# Allegro board MASINUTA_WI-FI.brd
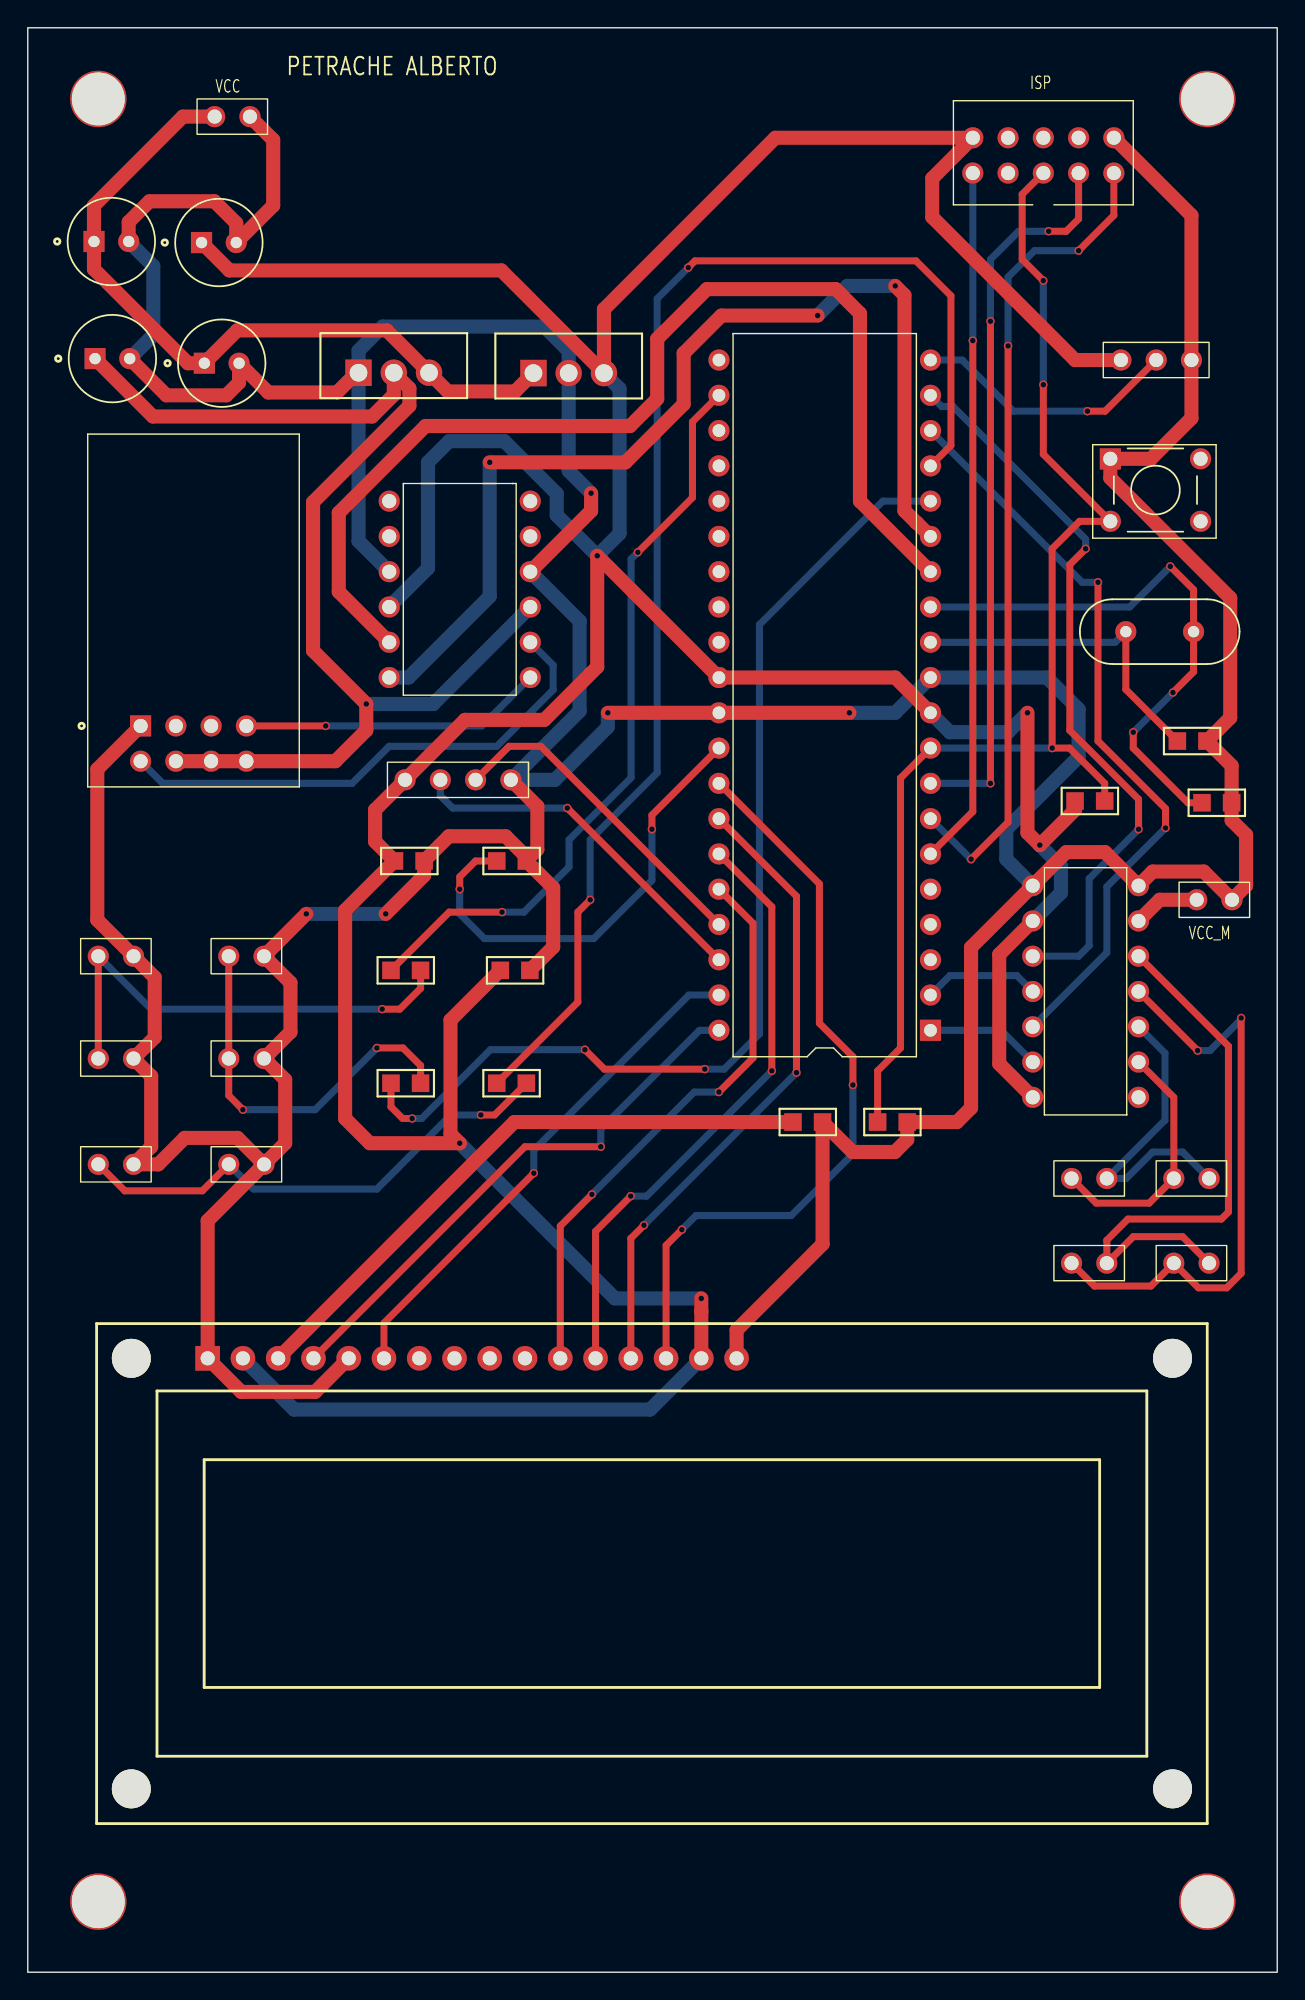
[diagram p0: board, top side]
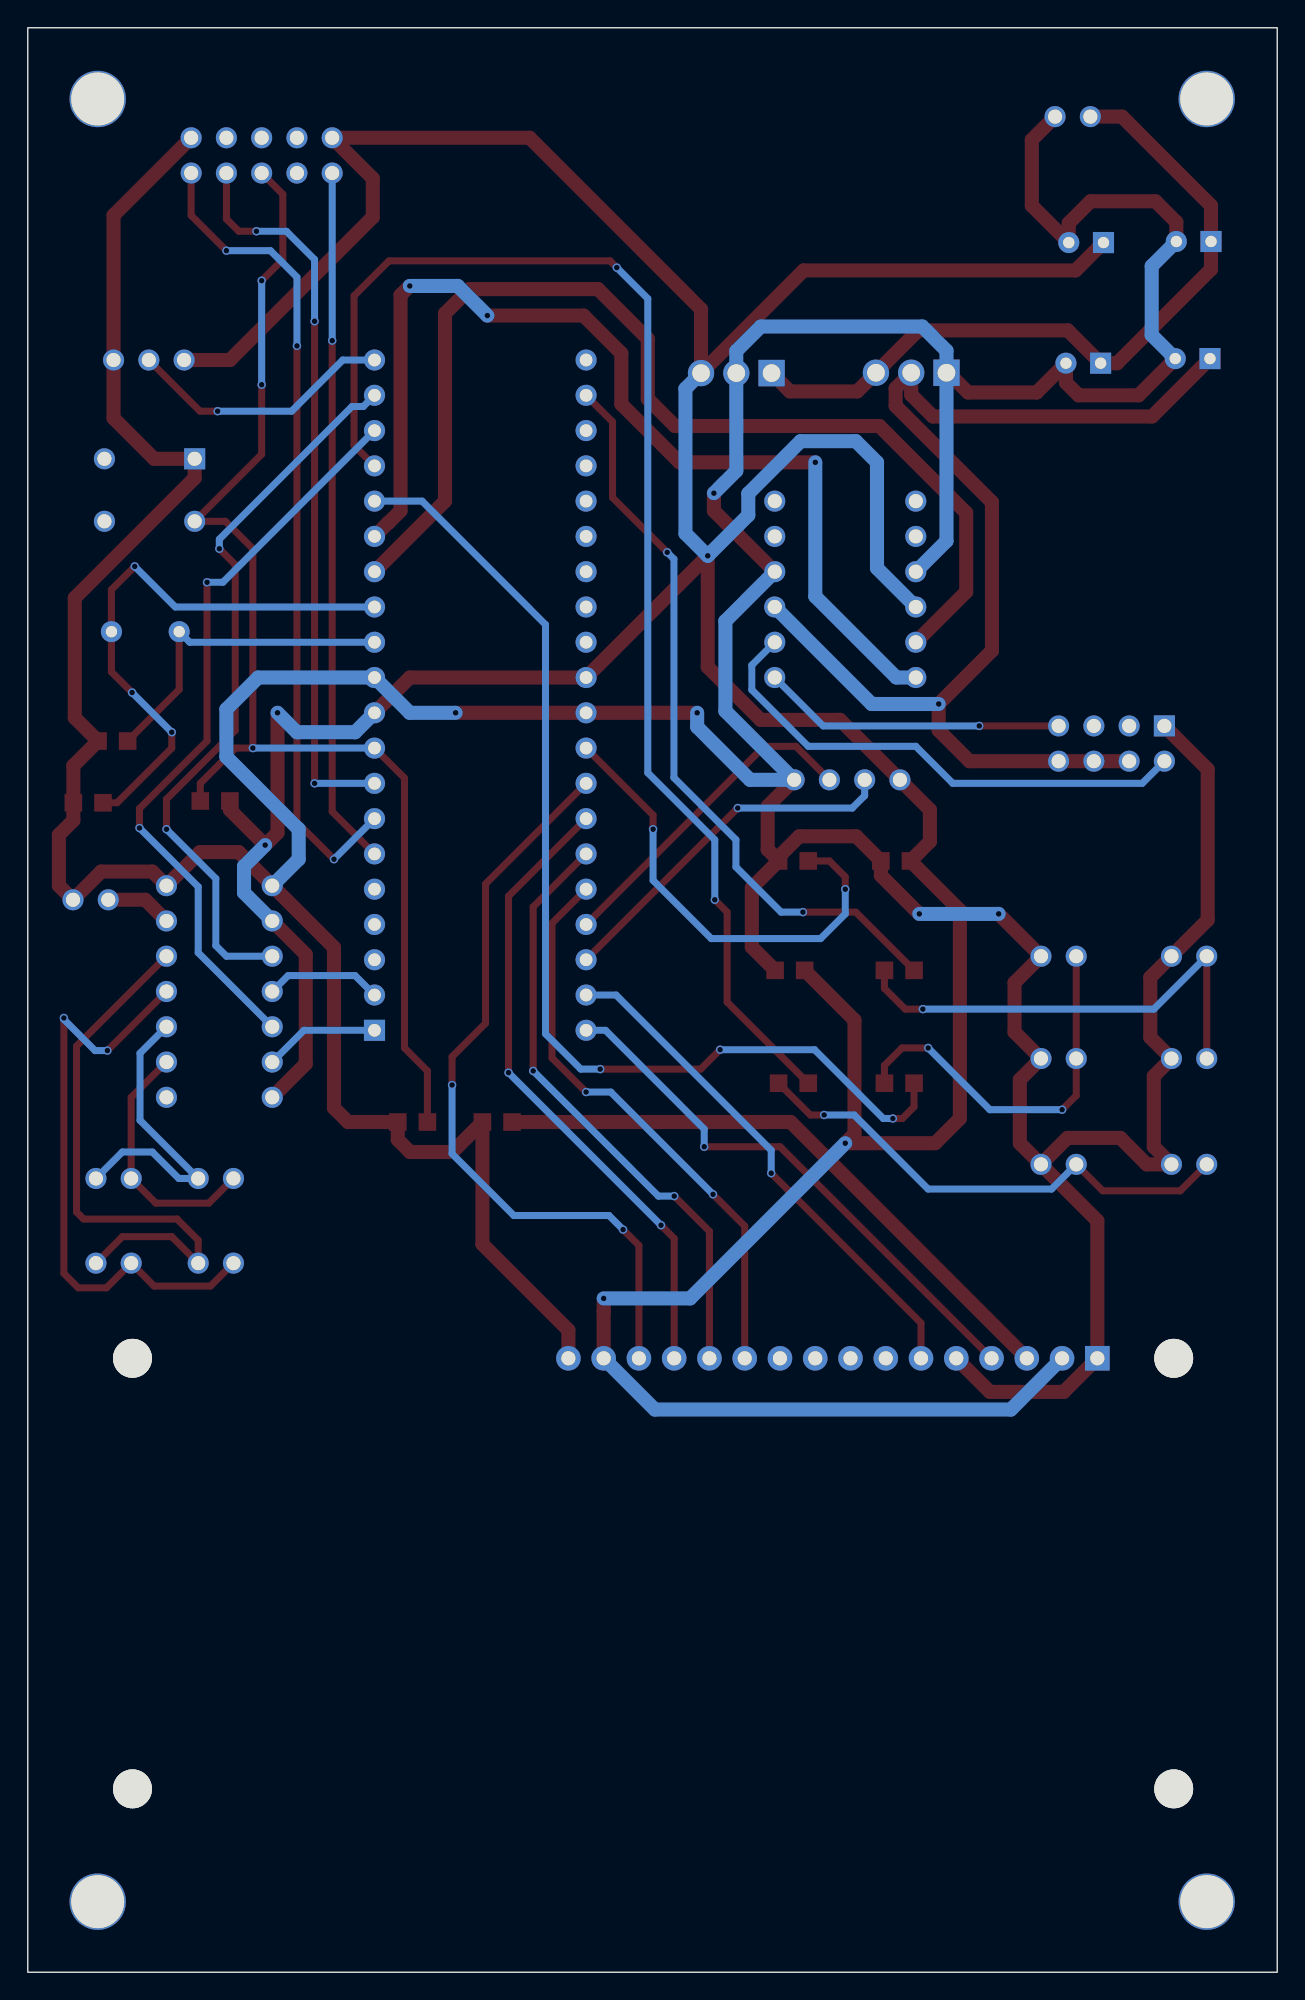
[diagram p1: board, bottom side, seen from below]

Outline 90 x 140 mm; copper layers: TOP, BOTTOM. Coordinates in mm from the lower left corner of the outline.
Outline path: rectangle 0,0 90,140

## Design rules (mm)
nets with their own width: min track width 0.508; nets MISO MOSI N07115 N07119 N08352 N08359 N08366 N08373 N08380 N08387 N08914 N08921 N10417 N10424 N10479 N10486 N11422 N11436 N12939 N12951 N12963 N15154 N15162 N15170 N27612 N34601 N34608 N36403 N36415 N43036 N54745 SCK
nets with their own width: min track width 1.016; nets +3.3V +5V GND N06033 N06910 N06922 N033242 N62158

## Placement (name value [footprint] x y rotation side)
BUZZ1  BUZZER  [JUMPER3]  78.74 116.08 0 top
C1  10u  [CAPTHT]  6.02 124.61 0 top
C2  10u  [CAPTHT]  6.1 116.18 0 top
C3  0.33u  [CAPTHT]  13.97 115.85 0 top
C4  0.1u  [CAPTHT]  13.77 124.54 0 top
C5  100n  [SMC0805]  33.78 80.01 0 top
C6  100n  [SMC0805]  61.21 61.21 0 top
C7  100n  [SMC0805]  34.04 72.14 0 top
C8  100n  [SMC0805]  26.42 80.01 0 top
C9  22p  [SMC0805]  82.8 88.65 0 top
C10  22p  [SMC0805]  84.58 84.2 0 top
D1  LED  [JUMPER2]  5.08 73.15 0 top
D2  LED  [JUMPER2]  5.08 65.79 0 top
D3  LED  [JUMPER2]  14.48 73.15 0 top
D4  LED  [JUMPER2]  14.48 65.79 0 top
D5  LED  [JUMPER2]  5.08 58.17 0 top
D6  LED  [JUMPER2]  14.48 58.17 0 top
J1  ISP  [CONN10]  68.07 129.54 0 top
J2  DC MOTOR  [JUMPER2]  75.18 57.15 0 top
J3  DC MOTOR  [JUMPER2]  82.55 57.15 0 top
J4  VCC  [JUMPER2]  13.46 133.6 0 top
J5  DC MOTOR  [JUMPER2]  75.18 51.05 0 top
J6  DC MOTOR  [JUMPER2]  82.55 51.05 0 top
J7  VCC MOTOARE  [JUMPER2]  84.2 77.22 0 top
NOREF  -  [unnamed]  5.08 5.08 0 top
NOREF#2  -  [unnamed]  84.96 134.87 0 top
NOREF#3  -  [#2]  0 140 0 top
NOREF#4  -  [unnamed]  5.08 134.87 0 top
NOREF#5  -  [#2]  90 0 90 top
NOREF#6  -  [unnamed]  84.96 5.08 0 top
R1  1.8k  [SMR0805]  55.12 61.21 0 top
R2  10k  [SMR0805]  75.44 84.33 0 top
R3  100  [SMR0805]  26.16 72.14 0 top
R4  100  [SMR0805]  26.16 64.01 0 top
R5  100  [SMR0805]  33.78 64.01 0 top
SW1  SW PUSHBUTTON  [PUSHSW]  77.98 108.97 0 top
U1  LM1117T-33  [TO254]  28.91 116.18 0 top
U2  -  [LCD-16X2]  44.96 28.7 0 top
U3  HC-SR04  [JUMPER4]  27.18 85.85 0 top
U4  -  [DRV8835]  72.39 78.23 0 top
U5  LM7805C  [TO254]  41.5 116.15 0 top
U6  ATMEGA1284-PU  [DIP40_6]  65.02 67.82 180 top
U7  CONVERTOR NIVEL LOGIC  [LOGICLEVELCONV]  26.04 105.92 0 top
U8  ESP-01  [ESP01]  11.94 98.04 0 top
Y1  14.7456MHz  [HC49]  81.53 96.52 0 top

## Library data of the parts
BUZZ1 = BUZZER_3: User Part Number: ***
C1 = CAP POL_0
C2 = CAP POL_3
C3 C4 = CAP POL_4
C5-C10 = C
D1-D6 = LED_0: User Part Number: ***
J1 = HEADER 5X2_1: User Part Number: ***
J2-J7 = HEADER 2: User Part Number: ***
R1-R5 = R
SW1 = SW PUSHBUTTON-SPST-NC_4
U1 = LM1117T-33_10
U2 = LCD-16X2_6
U3 = HC-SR04: User Part Number: ***
U4 = DRV8835_3
U5 = LM7805C_8
U6 = ATMEGA1284-PU_3: Tolerance: ***; User Part Number: ***
U7 = BOB-12009_5
U8 = ESP8266-01ESP-01_3
Y1 = CRYSTAL

## Footprints (pads in the part's own frame, mm; a bottom-side part is the same pattern mirrored in y, then rotated)
CAPTHT
  round 1.524 hole 0.813: N(1.25,0)
  rect 1.524x1.524 hole 0.813: P(-1.25,0)
CONN10
  round 1.524 hole 1.016: 1(0,0) 2(0,2.54) 3(2.54,0) 4(2.54,2.54) 5(5.08,0) 6(5.08,2.54) 7(7.62,0) 8(7.62,2.54) 9(10.16,0) 10(10.16,2.54)
DIP40_6
  rect 1.524x1.524 hole 0.914: 1(0,0)
  round 1.524 hole 0.914: 2(0,-2.54) 3(0,-5.08) 4(0,-7.62) 5(0,-10.16) 6(0,-12.7) 7(0,-15.24) 8(0,-17.78) 9(0,-20.32) 10(0,-22.86) 11(0,-25.4) 12(0,-27.94) 13(0,-30.48) 14(0,-33.02) 15(0,-35.56) 16(0,-38.1) 17(0,-40.64) 18(0,-43.18) 19(0,-45.72) 20(0,-48.26) 21(15.24,-48.26) 22(15.24,-45.72) 23(15.24,-43.18) 24(15.24,-40.64) 25(15.24,-38.1) 26(15.24,-35.56) 27(15.24,-33.02) 28(15.24,-30.48) 29(15.24,-27.94) 30(15.24,-25.4) 31(15.24,-22.86) 32(15.24,-20.32) 33(15.24,-17.78) 34(15.24,-15.24) 35(15.24,-12.7) 36(15.24,-10.16) 37(15.24,-7.62) 38(15.24,-5.08) 39(15.24,-2.54) 40(15.24,0)
DRV8835
  round 1.524 hole 1.016: 1(0,0) 2(0,-2.54) 3(0,-5.08) 4(0,-7.62) 5(0,-10.16) 6(0,-12.7) 7(0,-15.24) 8(7.62,-15.24) 9(7.62,-12.7) 10(7.62,-10.16) 11(7.62,-7.62) 12(7.62,-5.08) 13(7.62,-2.54) 14(7.62,0)
ESP01
  rect 1.524x1.524 hole 1.016: 1(-3.81,-8.31)
  round 1.524 hole 1.016: 2(-1.27,-8.31) 3(1.27,-8.31) 4(3.81,-8.31) 5(-3.81,-10.85) 6(-1.27,-10.85) 7(1.27,-10.85) 8(3.81,-10.85)
HC49
  round 1.524 hole 0.813: 1(-2.44,0) 2(2.44,0)
JUMPER2
  round 1.524 hole 1.016: 1(0,0) 2(2.54,0)
JUMPER3
  round 1.524 hole 1.016: 1(0,0) 2(2.54,0) 3(5.08,0)
JUMPER4
  round 1.524 hole 1.016: 1(0,0) 2(2.54,0) 3(5.08,0) 4(7.62,0)
LCD-16X2
  round 2.8 hole 2.8 unplated: (-37.5,15.5) (-37.5,-15.5) (37.5,15.5) (37.5,-15.5)
  rect 1.778x1.778 hole 1.016: 1(-32,15.5)
  round 1.778 hole 1.016: 2(-29.46,15.5) 3(-26.92,15.5) 4(-24.38,15.5) 5(-21.84,15.5) 6(-19.3,15.5) 7(-16.76,15.5) 8(-14.22,15.5) 9(-11.68,15.5) 10(-9.14,15.5) 11(-6.6,15.5) 12(-4.06,15.5) 13(-1.52,15.5) 14(1.02,15.5) 15(3.56,15.5) 16(6.1,15.5)
LOGICLEVELCONV
  round 1.524 hole 1.016: 1(0,0) 2(0,-2.54) 3(0,-5.08) 4(0,-7.62) 5(0,-10.16) 6(0,-12.7) 7(10.16,-12.7) 8(10.16,-10.16) 9(10.16,-7.62) 10(10.16,-5.08) 11(10.16,-2.54) 12(10.16,0)
PUSHSW
  rect 1.524x1.524 hole 1.016: 1(0,0)
  round 1.524 hole 1.016: 2(0,-4.5) 3(6.5,0) 4(6.5,-4.5)
SMC0805
  rect 1.27x1.27 smd: 1(0,0) 2(2.134,0)
SMR0805
  rect 1.27x1.27 smd: 1(0,0) 2(2.134,0)
TO254
  rect 1.905x1.905 hole 1.27: 1(-5.08,-1.016)
  round 1.905 hole 1.27: 2(-2.54,-1.016) 3(0,-1.016)
unnamed
  round 4.064 hole 3.81: (0,0)

## Nets
+3.3V: C2.P(1) U1.2(OUT) U7.9(LV) U8.6(CH_PD) U8.7(R\S\T\) U8.8(VCC)
+5V: BUZZ1.1(+) C4.P(1) C7.1 C8.1 J1.2(VCC) R2.1 U2.2(VDD) U2.15(A) U3.1(VCC) U4.2(VCC) U4.7(MODE) U5.3(OUT) U6.10(VCC) U6.30(AVCC) U7.4(HV)
GND: BUZZ1.3(-) C1.N(2) C2.N(2) C3.N(2) C4.N(2) C5.2 C6.2 C7.2 C8.2 C9.2 C10.2 D1.2(CATHODE) D2.2(CATHODE) D3.2(CATHODE) D4.2(CATHODE) D5.2(CATHODE) D6.2(CATHODE) J1.10(GND) J4.2 J7.2 R1.2 SW1.1 U1.1(ADJ/GND) U2.1(VSS) U2.5(R/W) U2.16(K) U3.4(GND) U4.1(GND#1) U4.14(GND#14) U5.2(GND) U6.11(GND_2) U6.31(GND) U7.3(GND#3) U7.10(GND#10) U8.1(GND)
MISO: J1.9(MISO) U6.7(PB6)
MOSI: J1.1(MOSI) U6.6(PB5)
SCK: J1.7(SCK) U6.8(PB7)
N06033: C1.P(1) C3.P(1) J4.1 U1.3(IN) U5.1(IN)
N06910: U6.14(PD0) U7.5(HV2)
N06922: U6.15(PD1) U7.6(HV1)
N07115: U7.8(LV2) U8.5(TXD)
N07119: U7.7(LV1) U8.4(RXD)
N08352: U2.4(RS) U6.40(PA0)
N08359: U2.6(E) U6.39(PA1)
N08366: U2.11(D4) U6.36(PA4)
N08373: U2.12(D5) U6.35(PA5)
N08380: U2.13(D6) U6.34(PA6)
N08387: U2.14(D7) U6.33(PA7)
N08914: C9.1 U6.12(XTAL2) Y1.1
N08921: C10.1 U6.13(XTAL1) Y1.2
N10417: J2.2 J3.2 U4.10(AOUT2)
N10424: J2.1 J3.1 U4.9(AOUT1)
N10479: J5.1 J6.1 U4.11(BOUT1)
N10486: J5.2 J6.2 U4.12(BOUT2)
N11422: U4.5(AENBL) U6.18(PD4)
N11436: U4.3(BENBL) U6.19(PD5)
N12939: D1.1(ANODE) D2.1(ANODE) R3.2
N12951: D3.1(ANODE) D4.1(ANODE) R4.2
N12963: D5.1(ANODE) D6.1(ANODE) R5.2
N15154: R3.1 U6.22(PC0)
N15162: R4.1 U6.16(PD2)
N15170: R5.1 U6.17(PD3)
N27612: C6.1 J1.5(RST) R2.2 SW1.2 U6.9(RESET)
N033242: R1.1 U2.3(VO)
N34601: U3.3(ECHO) U6.37(PA3)
N34608: U3.2(TRIG) U6.38(PA2)
N36403: U4.6(APHASE) U6.1(PB0)
N36415: U4.4(BPHASE) U6.2(PB1)
N43036: BUZZ1.2(S) U6.20(PD6)
N54745: C5.1 U6.32(AREF)
N62158: J7.1 U4.13(VIN)

Pads without a net: J1 3 4 6 8; SW1 3 4; U2 7 8 9 10; U4 8; U6 3 4 5 21 23 24 25 26 27 28 29; U7 1 2 11 12; U8 2 3

## Via types
v1: diameter 0.61, hole 0.4, TOP to BOTTOM, 59 vias

## Routing (per net, layer and track width the routed paths; a pad name or vN(x,y) marks a point on that pad's centre or on a via; arc(x,y) is an arc through that point)
+3.3V: length 85.5
  TOP w1.016: C2.P 9.01,112.01 24.8,112.01 26.37,113.58 U1.2 27.49,114.04 27.49,112.78 20.55,105.84 20.55,95.15 v1(24.38,91.31) 24.38,89.42 22.16,87.19 U8.8 U8.7 U8.6
  BOTTOM w1.016: v1(24.38,91.31) 29.21,91.31 U7.9
+5V: length 347.7
  TOP w1.016: C4.P 14.52,122.53 34.11,122.53 U5.3 41.5,119.74 53.85,132.08 J1.2 65.15,129.16 65.15,126.36 75.44,116.08 BUZZ1.1 ; v1(48.51,48.51) 48.51,47.57 48.52,47.57 U2.15 ; C7.1 30.45,68.55 30.45,60.35 v1(31.11,59.69) 24.64,59.69 22.86,61.47 22.86,76.45 C8.1 25.02,81.41 25.02,83.69 U3.1 31.5,90.17 37.21,90.17 41.02,93.98 v1(41.02,101.98) U6.30 62.48,93.22 U6.10 ; U4.7 69.98,65.41 69.98,73.28 U4.2 ; R2.1 75.44,83.69 v1(72.9,81.15) 72.01,82.04 v1(72.01,90.68)
  BOTTOM w1.016: U5.3 42.63,114.02 42.63,103.59 v1(41.02,101.98) 38.1,104.9 38.1,106.46 34.33,110.24 30.35,110.24 28.83,108.71 28.83,101.09 U7.4 ; v1(72.01,90.68) 70.61,89.28 66.42,89.28 U6.10 ; v1(48.51,48.51) 42.29,48.51 v1(31.11,59.69) ; U2.2 19.19,40.51 44.83,40.51 U2.15 ; v1(72.9,81.15) 74.42,79.63 74.42,77.72 U4.2
GND: length 453.8
  TOP w1.016: 35.92,80.04 35.92,80.3 34.42,81.79 30.33,81.79 C8.2 28.55,78.97 v1(25.78,76.2) ; 35.92,80.04 C5.2 37.85,78.08 37.85,73.81 C7.2 ; 35.92,80.04 36.7,80.83 36.7,83.95 U3.4 ; D6.2 18.54,59.69 18.54,64.26 D4.2 18.92,67.69 18.92,71.25 D3.2 v1(20.07,76.2) ; D6.2 12.96,54.11 U2.1 15.38,41.78 20.7,41.78 U2.5 ; D6.2 15.11,60.07 11.3,60.07 9.4,58.17 D5.2 8.89,59.44 8.89,64.52 D2.2 9.14,67.31 9.14,71.63 D1.2 5.01,75.76 5.01,86.61 U8.1 ; U2.16 51.06,46.23 57.25,52.43 R1.2 59.41,59.05 62.46,59.05 63.35,59.94 C6.2 66.93,61.21 67.94,62.23 67.94,73.79 U4.1 74.8,80.64 77.6,80.64 U4.14 81.03,79.25 84.71,79.25 J7.2 87.76,78.23 87.76,81.89 86.72,82.93 C10.2 86.72,86.87 C9.2 86.61,90.32 86.61,98.95 77.98,107.58 SW1.1 80.9,108.97 83.82,111.89 BUZZ1.3 83.82,126.49 J1.10 ; v1(41.78,90.68) U6.31 v1(59.18,90.68) ; C1.N 7.27,126.01 8.77,127.51 13.44,127.51 15.02,125.93 C4.N 17.68,127.2 17.68,131.93 J4.2 ; U1.1 23.7,115.16 22.28,113.74 17.33,113.74 C3.N 15.22,114.45 14.31,113.54 9.99,113.54 C2.N ; U7.10 40.58,105.22 v1(40.58,106.49)
  BOTTOM w1.016: C1.N 9.04,122.84 9.04,117.88 C2.N ; U7.3 23.83,103.05 U1.1 23.83,116.75 25.57,118.49 37.2,118.49 38.96,116.73 U5.2 38.96,108.1 v1(40.58,106.49) ; v1(59.18,90.68) 62.48,90.68 U6.11 73.41,93.22 75.69,90.93 75.69,87.5 70.48,82.3 70.48,80.14 U4.1 ; U7.10 39.75,97.28 39.75,90.81 U3.4 37.97,85.85 41.78,89.66 v1(41.78,90.68) ; v1(20.07,76.2) v1(25.78,76.2)
MISO: length 59.7
  TOP w0.508: v1(75.69,123.95) 78.23,126.49 J1.9 ; v1(67.94,80.14) 70.61,82.8 v1(70.61,117.09)
  BOTTOM w0.508: v1(70.61,117.09) 70.61,122.05 72.52,123.95 v1(75.69,123.95) ; v1(67.94,80.14) U6.7
MOSI: length 50.3
  TOP w0.508: U6.6 68.07,83.57 v1(68.07,117.47)
  BOTTOM w0.508: J1.1 v1(68.07,117.47)
SCK: length 52.9
  TOP w0.508: J1.7 75.69,126.24 74.8,125.35 v1(73.53,125.35) ; v1(69.34,118.87) v1(69.34,85.6)
  BOTTOM w0.508: v1(69.34,85.6) U6.8 ; v1(69.34,118.87) 69.34,123.32 71.37,125.35 v1(73.53,125.35)
N06033: length 53.7
  TOP w1.016: J4.1 11.18,133.6 4.77,127.2 C1.P 4.77,122.61 11.53,115.85 C3.P 15.08,118.21 25.86,118.21 U1.3 30.25,113.82 35.1,113.82 U5.1
N06910: length 79
  TOP w1.016: U6.14 59.94,105.92 59.94,119.43 58.19,121.18 48.92,121.18 45.34,117.6 45.34,113.28 43.38,111.33 28.65,111.33 22.4,105.08 22.4,99.39 U7.5
N06922: length 75
  TOP w1.016: v1(33.27,108.71) 43.05,108.71 47.24,112.9 47.24,116.56 49.96,119.28 v1(56.9,119.28) ; U6.15 64.04,104.37 64.01,104.37 63.15,105.23 63.15,120.75 v1(62.48,121.41)
  BOTTOM w1.016: v1(62.48,121.41) 59.03,121.41 v1(56.9,119.28) ; U7.6 27.43,93.22 33.27,99.06 v1(33.27,108.71)
N07115: length 37.3
  BOTTOM w0.508: U7.8 37.85,94.11 37.85,92.33 33.78,88.27 26.04,88.27 23.37,85.6 9.72,85.6 U8.5
N07119: length 21.9
  TOP w0.508: U8.4 v1(21.46,89.73)
  BOTTOM w0.508: U7.7 32.71,89.73 v1(21.46,89.73)
N08352: length 39.7
  TOP w0.508: U2.4 35.81,59.44 v1(41.27,59.44)
  BOTTOM w0.508: U6.40 48.39,67.82 41.27,60.71 v1(41.27,59.44)
N08359: length 37.4
  TOP w0.508: v1(36.45,57.53) 25.66,46.74 U2.6
  BOTTOM w0.508: v1(36.45,57.53) 36.45,59.18 47.62,70.36 U6.39
N08366: length 41.6
  TOP w0.508: v1(40.64,56.01) 38.36,53.73 U2.11 ; U6.36 52.24,75.52 52.24,65.83 v1(49.78,63.37)
  BOTTOM w0.508: v1(40.64,56.01) 48.01,63.37 v1(49.78,63.37)
N08373: length 43.8
  TOP w0.508: v1(43.43,55.88) 40.9,53.34 U2.12 ; U6.35 53.59,76.71 v1(53.59,64.9)
  BOTTOM w0.508: v1(43.43,55.88) 44.58,55.88 v1(53.59,64.9)
N08380: length 46.1
  TOP w0.508: U6.34 55.37,77.47 v1(55.37,64.77) ; U2.13 43.44,52.84 v1(44.39,53.78)
  BOTTOM w0.508: v1(55.37,64.77) v1(44.39,53.78)
N08387: length 55
  TOP w0.508: v1(59.44,63.88) 59.44,65.91 57.02,68.33 57.02,78.36 U6.33 ; U2.14 45.98,52.33 v1(47.12,53.47)
  BOTTOM w0.508: v1(59.44,63.88) 59.44,58.93 54.99,54.48 48.13,54.48 v1(47.12,53.47)
N08914: length 23.8
  TOP w0.508: Y1.1 79.09,92.36 C9.1
  BOTTOM w0.508: U6.12 78.33,95.76 Y1.1
N08921: length 40.6
  TOP w0.508: C10.1 83.57,84.2 79.63,88.14 v1(79.63,89.28) ; v1(82.49,92.14) 83.97,93.63 Y1.2 83.97,99.54 v1(82.3,101.22)
  BOTTOM w0.508: U6.13 79.38,98.3 v1(82.3,101.22) ; v1(82.49,92.14) v1(79.63,89.28)
N10417: length 22.4
  BOTTOM w0.508: J3.2 83.19,59.05 81.03,59.05 79.12,57.15 J2.2 81.92,61.34 81.92,66.17 U4.10
N10424: length 18.3
  TOP w0.508: J2.1 76.96,55.37 80.77,55.37 J3.1 82.55,62.99 U4.9
N10479: length 43.3
  TOP w0.508: v1(87.4,68.71) 87.4,50.31 86.36,49.28 84.33,49.28 J6.1 80.9,49.4 76.83,49.4 J5.1 ; U4.11 v1(84.26,66.36)
  BOTTOM w0.508: v1(84.26,66.36) 85.15,66.36 87.4,68.6 v1(87.4,68.71)
N10486: length 41.3
  TOP w0.508: U4.12 86.49,66.67 86.49,54.74 85.98,54.23 79.25,54.23 77.72,52.7 J5.2 79.63,52.96 83.19,52.96 J6.2
N11422: length 54.6
  TOP w0.508: v1(77.09,100.08) 77.09,88.65 81.95,83.78 v1(81.95,82.38)
  BOTTOM w0.508: U4.5 77.72,73.41 77.72,78.16 v1(81.95,82.38) ; U6.18 75.95,100.08 v1(77.09,100.08)
N11436: length 53.1
  TOP w0.508: v1(80.01,82.3) 80.01,84.45 75.06,89.41 75.06,101.35 v1(76.2,102.49)
  BOTTOM w0.508: v1(80.01,82.3) 76.45,78.74 76.45,73.91 75.69,73.15 U4.3 ; v1(76.2,102.49) 76.2,103.17 66.65,112.73 65.83,112.73 U6.19
N12939: length 34.1
  TOP w0.508: v1(25.53,69.34) 26.8,69.34 28.3,70.84 R3.2 ; D1.1 D2.1
  BOTTOM w0.508: D1.1 8.89,69.34 v1(25.53,69.34)
N12951: length 27.9
  TOP w0.508: v1(25.15,66.55) 27.03,66.55 28.3,65.28 R4.2 ; D3.1 D4.1 14.48,63.12 v1(15.49,62.1)
  BOTTOM w0.508: v1(15.49,62.1) 20.7,62.1 v1(25.15,66.55)
N12963: length 36.3
  TOP w0.508: v1(32.64,61.72) 33.63,61.72 R5.2 ; D5.1 6.99,56.26 12.57,56.26 D6.1
  BOTTOM w0.508: D6.1 16.26,56.39 25.15,56.39 30.48,61.72 v1(32.64,61.72)
N15154: length 54.3
  TOP w0.508: v1(43.94,102.23) 47.88,106.17 47.88,111.63 U6.22 ; v1(34.16,76.33) 30.35,76.33 R3.1
  BOTTOM w0.508: v1(43.94,102.23) 43.46,101.75 43.46,86 38.99,81.53 38.99,79.58 35.74,76.33 v1(34.16,76.33)
N15162: length 77.7
  TOP w0.508: R4.1 26.16,62.31 27,61.47 v1(27.69,61.47) ; v1(48.77,65.02) 41.53,65.02 v1(40.13,66.42)
  BOTTOM w0.508: v1(48.77,65.02) 50.16,65.02 52.7,67.56 52.7,97.03 61.59,105.92 U6.16 ; v1(27.69,61.47) 28.37,61.47 33.32,66.42 v1(40.13,66.42)
N15170: length 97.5
  TOP w0.508: R5.1 39.62,69.85 39.62,76.33 v1(40.51,77.22) ; v1(47.57,122.73) 48.06,123.22 63.98,123.22 66.5,120.7 66.5,109.93 U6.17
  BOTTOM w0.508: v1(40.51,77.22) 40.51,81.53 45.34,86.36 45.34,120.5 v1(47.57,122.73)
N27612: length 91.1
  TOP w0.508: J1.5 71.63,128.02 71.63,123.32 v1(73.15,121.79) ; U6.9 62.87,85.98 62.87,66.55 61.21,64.9 C6.1 ; v1(73.15,114.3) 73.15,109.29 SW1.2 75.76,104.47 73.79,102.49 v1(73.79,88.14) 75.03,88.14 77.57,85.6 R2.2
  BOTTOM w0.508: v1(73.79,88.14) U6.9 ; v1(73.15,121.79) v1(73.15,114.3)
N033242: length 44.1
  TOP w1.016: R1.1 35.05,61.21 U2.3
N34601: length 23.8
  TOP w0.508: U6.37 36.96,88.27 34.67,88.27 U3.3
N34608: length 26.1
  TOP w0.508: v1(38.86,83.82) U6.38
  BOTTOM w0.508: U3.2 29.72,84.71 30.61,83.82 v1(38.86,83.82)
N36403: length 8.3
  BOTTOM w0.508: U6.1 70.1,67.82 U4.6
N36415: length 8.4
  BOTTOM w0.508: U4.4 71.25,71.75 66.42,71.75 U6.2
N43036: length 19.3
  TOP w0.508: v1(76.33,112.39) 77.6,112.39 BUZZ1.2
  BOTTOM w0.508: U6.20 67.31,116.08 70.99,112.39 v1(76.33,112.39)
N54745: length 33.6
  TOP w0.508: v1(31.11,77.98) 31.11,78.87 32.26,80.01 C5.1 ; U6.32 44.96,83.31 v1(44.96,82.3)
  BOTTOM w0.508: v1(31.11,77.98) 31.11,76.2 32.89,74.42 40.77,74.42 44.96,78.61 v1(44.96,82.3)
N62158: length 4.8
  TOP w1.016: U4.13 81.53,77.22 J7.1

## Text on the board
Ref Des/Silkscreen Top: VCC | ISP | VCC_M | PETRACHE ALBERTO
XSECTION_CHART: *  SURFACE - AIR 0 MIL | L1: TOP CONDUCTOR - COPPER 30.81 MIL | *  DIELECTRIC - FR-4 1.38 MIL | L2: BOTTOM CONDUCTOR - COPPER 30.81 MIL | DESIGN CROSS SECTION CHART | ___________________________ | TOTAL THICKNESS 63 MIL | 1-2 | FIGURE | SIZE | 15.74 | 32.0 | 36.0 | 40.0 | 50.0 | 150.0 | 110.24 | DRILL CHART: TOP to BOTTOM | ALL UNITS ARE IN MILS | PLATED | NON-PLATED | QTY | 59 | 10 | 40 | 95 | 6 | 4
